# EAGLE board Layout-APC_1.3 (EAGLE 5.08)
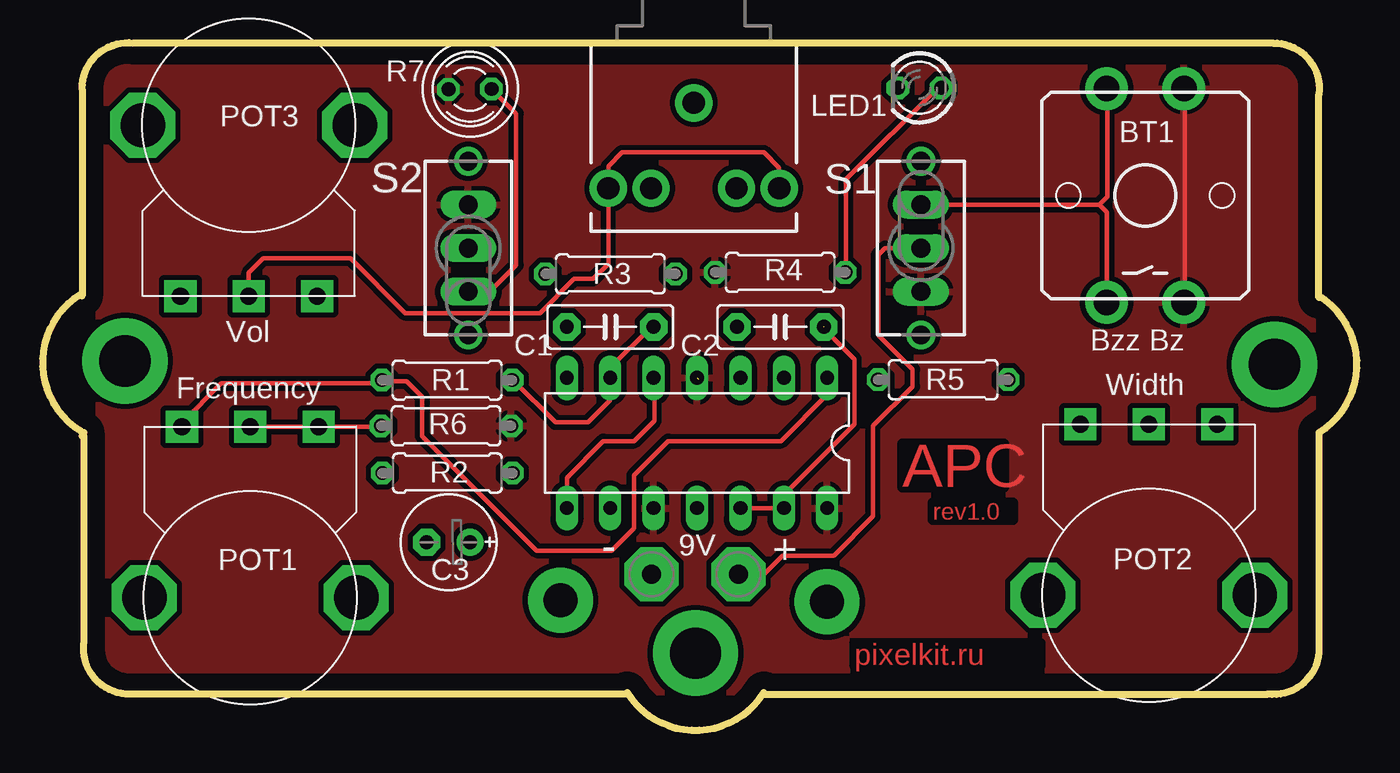
[diagram p0: board, top side]
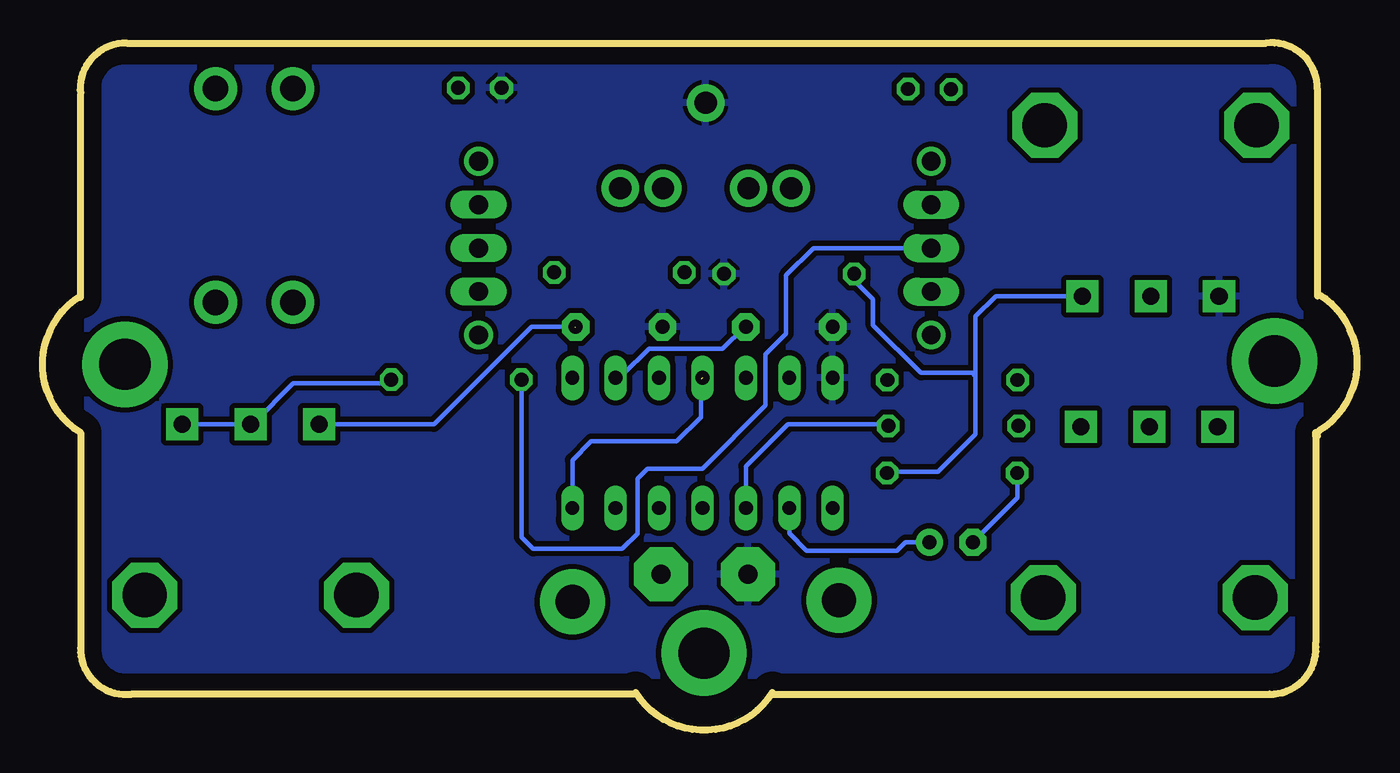
[diagram p1: board, bottom side, seen from below]

Size 76.92 x 40.23 mm. Coordinates in mm from the lower left corner, seen from the top.
Outline: 2.21,25.51 arc116 2.21,17.51
Outline: 2.31,25.41 2.31,37.51 arc-98 5.31,40.21 72.01,40.21 arc-98 74.71,37.21 74.71,25.31
Outline: 2.31,17.21 2.41,17.21
Outline: 2.41,17.21 2.41,17.41
Outline: 74.71,25.41 arc-116 74.71,17.41 74.71,4.81 arc-98 71.71,2.11 42.21,2.11
Outline: 34.21,2.21 arc116 42.21,2.21
Outline: 34.21,2.11 5.11,2.11 arc-98 2.41,5.11 2.41,17.21
Copper layers (1*16): Top 0.035mm / dielectric 1.5mm / Bottom 0.035mm
Design rules "default *": minimum track width 10mil, minimum drill 24mil, track to track 12mil, track to pad 12mil, pad to pad 12mil, via to via 8mil, smd to smd 8mil, copper to edge 40mil, drill to drill 8mil, minimum pad ring 10mil, minimum via ring 8mil, stop-mask expansion 4mil, vias tented up to drill 0mil, thermal gap 10mil

## Footprints (pad centres in the part's own frame; a part is rotated, then mirrored left to right if it is on the bottom)
AUDIO-JACK = drill 1.3 pad 2.184 round: 1 0,0; 2 5,5; 3 5,2.5; 4 5,-2.5; 5 5,-5
AB9V = drill 1.118 pad 3.15 octagon: + 0,2.54; - 0,-2.54
TACTILE-PTH = drill 1.5 pad 2.5 round: 1 -6.251,2.261; 2 6.251,2.261; 3 -6.251,-2.261; 4 6.251,-2.261
C5B2.5 = drill 0.813 pad 1.6 octagon: 1 -2.54,0; 2 2.54,0
E2,5-6E = drill 0.813 pad 1.575 round: + -1.27,0 | drill 0.813 pad 1.575 octagon: - 1.27,0
DIL14 = drill 0.813 long: 1 -7.62,-3.81; 2 -5.08,-3.81; 3 -2.54,-3.81; 4 0,-3.81; 5 2.54,-3.81; 6 5.08,-3.81; 7 7.62,-3.81; 8 7.62,3.81; 9 5.08,3.81; 10 2.54,3.81; 11 0,3.81; 12 -2.54,3.81; 13 -5.08,3.81; 14 -7.62,3.81
LED3MM = drill 0.813 octagon: A -1.27,0; K 1.27,0
ALPS_POT = drill 1 pad 1.88 square: P$1 11,-4; P$2 11,0; P$3 11,4 | drill 2.6 pad 3.81 octagon: P$4 1,-6.2; P$5 1,6.2
0207/7 = drill 0.813 octagon: 1 -3.81,0; 2 3.81,0
BPX65 = drill 0.813 octagon: A -0.889,-0.889; K 0.889,0.889
TL3XYO = drill 1.1 pad 1.422 long: 1 -2.54,0; 2 0,0; 3 2.54,0 | drill 1.1 pad 1.676 round: M1 -5.08,0; M2 5.08,0

## Placement (x,y rotation side)
3.5MM  AUDIO-JACKPTH  [AUDIO-JACK]  38.11,36.71 270 top
9V_BATTERY  AB9V  [AB9V]  38.18,9.13 270 top
BT1  OMRON_12MM  [TACTILE-PTH]  64.54,31.29 90 top
C1  10nF  [C5B2.5]  33.22,23.6 0 top
C2  0.1uF  [C5B2.5]  43.18,23.6 180 top
C3  10uF  [E2,5-6E]  23.75,11 180.4 top
IC1  NE556  [DIL14]  38.3,16.81 180 top
LED1  [LED3MM]  51.33,37.59 180 top
POT1  500K  [ALPS_POT]  12.15,6.76 90 top
POT2  500K  [ALPS_POT]  64.75,6.9 90 top
POT3  50K  [ALPS_POT]  12.06,36.4 270 top
R1  1K  [0207/7]  23.67,20.49 0 top
R2  10K  [0207/7]  23.69,15.05 180 top
R3  4.7K  [0207/7]  33.23,26.7 0 top
R4  1K  [0207/7]  43.17,26.79 180 top
R5  3K  [0207/7]  52.71,20.51 0 top
R6  24K  [0207/7]  23.61,17.81 0 top
R7  VT93N1  [BPX65]  25.01,37.51 135.4 top
S1  TL36YO  [TL3XYO]  51.41,28.21 270 top
S2  TL36YO  [TL3XYO]  24.91,28.21 90 top

## Library data of the parts
3.5MM 9V_BATTERY BT1 POT1-POT3 R7 = Atarity
C1 C2 = capacitor-wima
C3 R1-R6 = rcl
IC1 = st-microelectronics
LED1 = led
S1 S2 = switch

## Nets
GND: 3.5MM.1 9V_BATTERY.- C1.1 C2.2 IC1.7 LED1.K POT3.P$1 R3.2
N$1: IC1.1 POT1.P$3 R1.1
N$2: C1.2 IC1.2 IC1.6 R1.2
N$3: LED1.A R4.1
N$5: 3.5MM.2 3.5MM.5 POT3.P$2
N$6: C3.+ IC1.9
N$7: C3.- R2.2
N$8: POT3.P$3 R2.1 R3.1
N$9: POT2.P$1 POT2.P$2 R5.2
N$10: R7.A S2.1
N$11: 9V_BATTERY.+ S1.2
N$12: BT1.1 BT1.2 S1.1
N$13: C2.1 IC1.12 IC1.13 POT2.P$3
N$15: R5.1 S2.2
N$16: POT1.P$1 POT1.P$2 R6.1
TRIG: IC1.5 IC1.8
VCC: BT1.3 BT1.4 IC1.4 IC1.10 IC1.14 R4.2 R6.2 R7.K S1.3 S2.3

## Tracks (layer width: path | path; a pad name or v marks a point on that pad's centre or on a via)
GND
  pour Bottom: 3.31,39.21 74.31,39.21 74.31,3.21 3.31,3.21
N$1
  Top 0.254: POT1.P$3 8.17,18.01 10.46,20.29 19.85,20.29 19.94,20.38 19.94,20.41 | IC1.1 45.92,19.62 43.21,16.91 36.61,16.91 34.61,14.91 34.61,11.81 33.31,10.51 28.91,10.51 22.21,17.21 22.21,19.51 21.31,20.41 19.94,20.41 | 19.94,20.41 R1.1
N$2
  Top 0.254: C1.2 35.6,23.6 33.22,21.22 IC1.6 33.21,19.31 31.91,18.01 30.01,18.01 27.53,20.49 R1.2
  Bottom 0.254: IC1.2 43.22,20.8 42.97,20.8 41.44,22.33 37.13,22.33 35.86,23.6 C1.2
N$3
  Top 0.254: R4.1 47.03,26.9 47.03,32.23 52.37,37.57 LED1.A
N$4  (via drill 2 pad 3.81)
  other vias: 45.91,7.51
N$5
  Top 0.254: 3.5MM.2 43.11,32.91 42.21,33.81 33.91,33.81 33.11,33.01 3.5MM.5 33.11,27.31 32.21,26.41 31.11,26.41 29.11,24.41 21.21,24.41 18.01,27.61 12.91,27.61 12.06,26.76 POT3.P$2
N$6
  Bottom 0.254: IC1.9 33.22,11.52 32.21,10.51 26.91,10.51 26.41,11.01 C3.+
N$7
  Bottom 0.254: R2.2 19.88,13.59 C3.-
N$8
  Bottom 0.254: POT3.P$3 21.12,25.4 22.31,24.21 22.31,20.71 | 22.31,20.71 22.31,17.31 24.51,15.11 27.44,15.11 R2.1 | R3.1 29.42,26.32 28.31,25.21 28.31,23.71 25.51,20.91 22.51,20.91 22.31,20.71
N$9
  Bottom 0.254: R5.2 56.68,20.29 62.27,20.29 64.56,18.01 POT2.P$2 POT2.P$1
N$10
  Top 0.254: R7.A 27.71,36.08 27.71,27.21 26.13,25.63 24.96,25.63 S2.1
N$11
  Top 0.254: 9V_BATTERY.+ 42.23,9.13 43.31,10.21 46.31,10.21 48.61,12.51 48.61,17.81 50.91,20.11 50.91,21.11 48.91,23.11 48.91,27.81 49.31,28.21 S1.2
N$12
  Top 0.254: S1.1 61.85,30.75 | 61.85,30.75 62.31,31.21 62.31,37.51 BT1.2 | BT1.1 62.28,30.32 61.85,30.75
N$13  (1 unrouted)
  Top 0.254: 45.76,23.6 45.76,23.46 47.51,21.71 47.51,17.91 43.41,13.81 43.41,13.03 IC1.13 IC1.12
  Bottom 0.254: POT2.P$3 54.02,17.9 48.31,23.61 C2.1
N$14  (via drill 2 pad 3.81)
  other vias: 30.31,7.61
N$15
  Bottom 0.254: 24.93,28.17 S2.2 31.81,28.21 33.41,26.61 33.41,23.21 34.61,22.01 34.61,19.01 38.31,15.31 41.51,15.31 42.11,14.71 42.11,11.51 43.01,10.61 48.21,10.61 48.9,11.3 R5.1
N$16
  Top 0.254: R6.1 19.6,17.75 16.3,17.75 POT1.P$1 16.04,17.75 12.23,17.75 POT1.P$2
N$17  (via drill 3 pad 5)
  other vias: 4.81,21.61
N$18  (via drill 3 pad 5)
  other vias: 72.11,21.41
N$19  (via drill 3 pad 5)
  other vias: 38.21,4.51
TRIG
  Top 0.254: IC1.5 35.81,20.57 35.81,18.11 34.61,16.91 32.81,16.91 30.68,14.78 IC1.8
VCC  (1 unrouted)
  Top 0.254: BT1.3 66.84,25.12 66.84,37.31 BT1.4 | IC1.10 35.86,13.18
  Bottom 0.254: 38.4,20.55 38.4,18.33 39.81,16.91 44.81,16.91 45.91,15.81 45.91,13.11 46.01,13.01 IC1.14 | IC1.10 35.76,15.46 33.31,17.91 27.61,17.91 27.51,17.81
  pour Top: 3.31,39.21 74.31,39.21 74.31,2.21 3.31,2.21

## Text on the board
Top: APC | rev1.0 | pixelkit.ru
_tsilk: Vol | Bzz Bz | Frequency | Width | - | 9V | +